# EAGLE board uart_rs232_adapter (EAGLE 9.4.2)
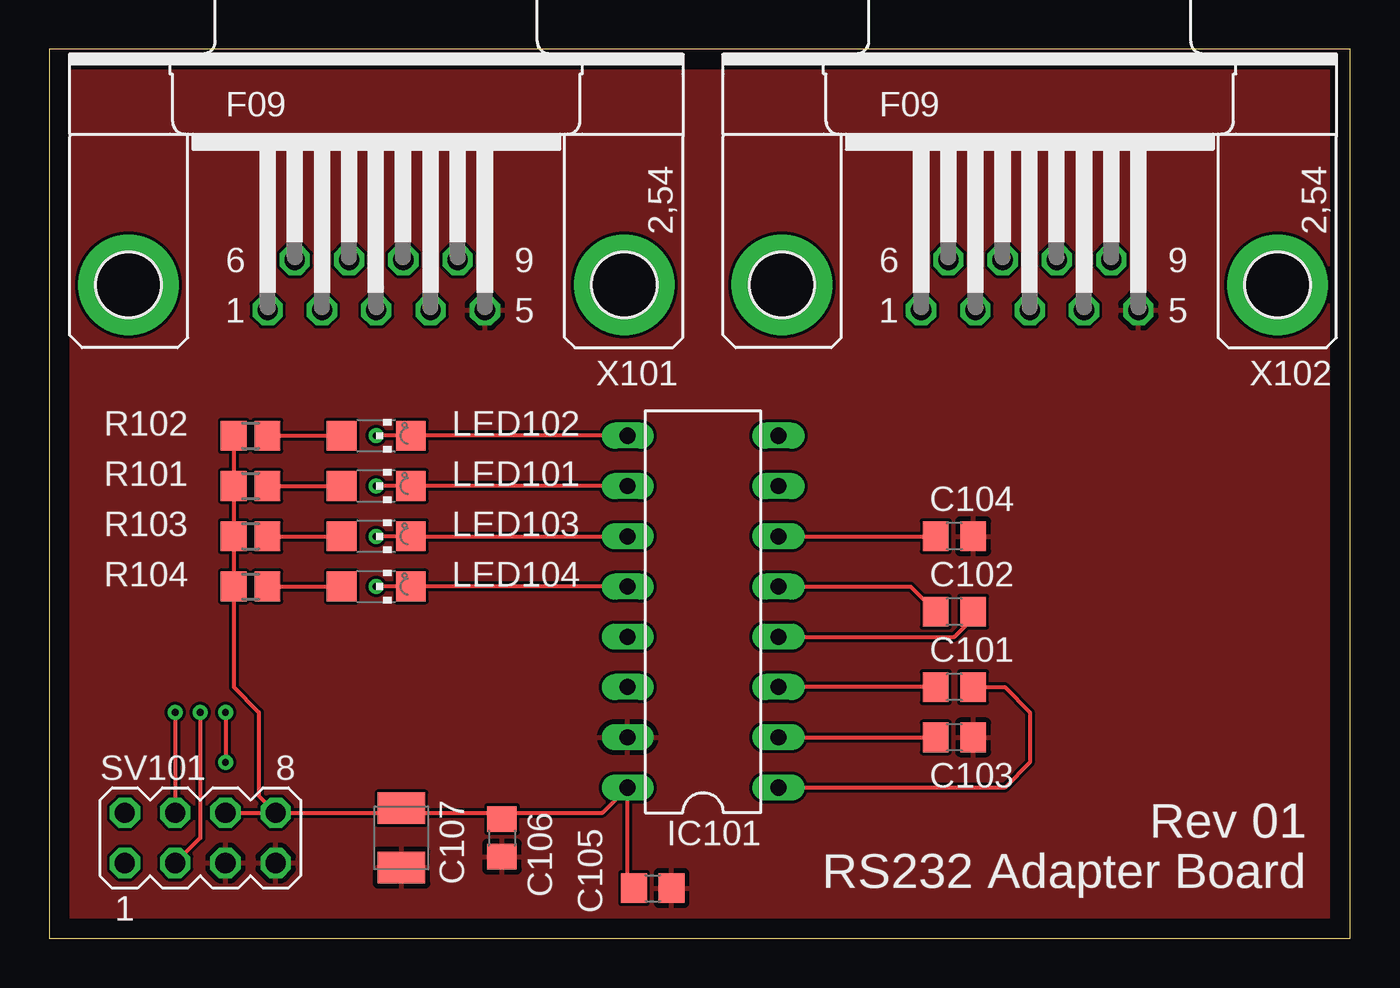
[diagram p0: board, top side]
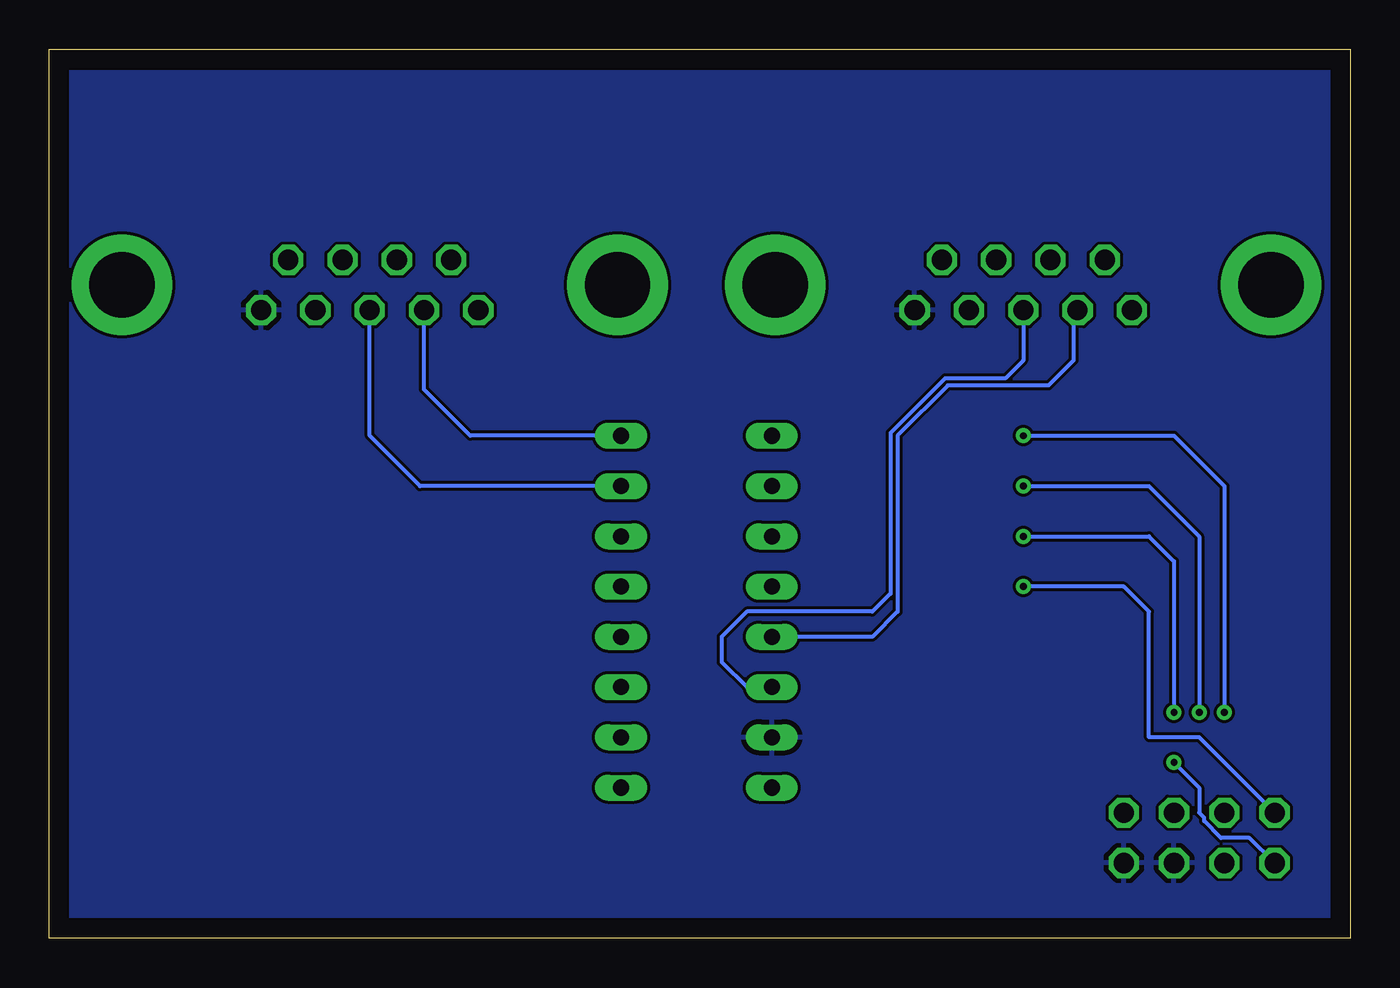
[diagram p1: board, bottom side, seen from below]

Size 65.71 x 44.92 mm. Coordinates in mm from the lower left corner, seen from the top.
Outline: 0,0 65.71,0 65.71,44.92 0,44.92 0,0
Copper layers (1*16): Top 0.035mm / dielectric 0.15mm / Bottom 0.035mm
Design rules "default": minimum track width 6mil, minimum drill 0.35mm, track to track 6mil, track to pad 6mil, pad to pad 6mil, via to via 6mil, smd to smd 6mil, copper to edge 40mil, drill to drill 6mil, minimum pad ring 10mil, minimum via ring 8mil, stop-mask expansion 4mil, vias tented up to drill 0mil, thermal gap 10mil
Net classes: 0 default: width 0.203 mm

## Footprints (pad centres in the part's own frame; a part is rotated, then mirrored left to right if it is on the bottom)
C0805 = smd 1.3 x 1.5: 1 -0.95,0; 2 0.95,0
SMC_B = smd 1.6 x 2.4: + -1.5,0; - 1.5,0
DIL16 = drill 0.813 long: 1 -8.89,-3.81; 2 -6.35,-3.81; 3 -3.81,-3.81; 4 -1.27,-3.81; 5 1.27,-3.81; 6 3.81,-3.81; 7 6.35,-3.81; 8 8.89,-3.81; 9 8.89,3.81; 10 6.35,3.81; 11 3.81,3.81; 12 1.27,3.81; 13 -1.27,3.81; 14 -3.81,3.81; 15 -6.35,3.81; 16 -8.89,3.81
CHIPLED_1206 = smd 1.5 x 1.5: A 0,-1.75; C 0,1.75
R2012 = smd 1.3 x 1.5: 1 -0.85,0; 2 0.85,0
MA04-2 = drill 1.016 octagon: 1 -3.81,-1.27; 2 -3.81,1.27; 3 -1.27,-1.27; 4 -1.27,1.27; 5 1.27,-1.27; 6 1.27,1.27; 7 3.81,-1.27; 8 3.81,1.27
F09HP = drill 1.016 octagon: 1 -5.486,-1.27; 2 -2.743,-1.27; 3 0,-1.27; 4 2.743,-1.27; 5 5.486,-1.27; 6 -4.115,1.27; 7 -1.372,1.27; 8 1.372,1.27; 9 4.115,1.27 | drill 3.302 pad 5.08: G1 -12.522,0; G2 12.522,0

## Placement (x,y rotation side)
C101  1µF  [C0805]  45.72,12.7 180 top
C102  1µF  [C0805]  45.72,16.51 180 top
C103  1µF  [C0805]  45.72,10.16 180 top
C104  1µF  [C0805]  45.72,20.32 180 top
C105  100nF  [C0805]  30.48,2.54 0 top
C106  100nF  [C0805]  22.86,5.08 270 top
C107  10µF  [SMC_B]  17.78,5.08 270 top
IC101  MAX232  [DIL16]  33.02,16.51 90 top
LED101  [CHIPLED_1206]  16.51,22.86 270 top
LED102  [CHIPLED_1206]  16.51,25.4 270 top
LED103  [CHIPLED_1206]  16.51,20.32 270 top
LED104  [CHIPLED_1206]  16.51,17.78 270 top
R101  3k  [R2012]  10.16,22.86 0 top
R102  3k  [R2012]  10.16,25.4 0 top
R103  3k  [R2012]  10.16,20.32 0 top
R104  3k  [R2012]  10.16,17.78 0 top
SV101  [MA04-2]  7.62,5.08 0 top
X101  [F09HP]  16.51,33.02 0 top
X102  [F09HP]  49.53,33.02 0 top

## Library data of the parts
C101-C104 = rcl; MOUSER: 710-885012207078; SPICEPREFIX: C
C105 C106 = rcl; MOUSER: 710-885012207072; SPICEPREFIX: C
C107 = rcl; MOUSER: 581-TAJB106K020RNJV; SPICEPREFIX: C
IC101 = maxim; MF: MAXIM; MOUSER: 595-MAX232ECN; MPN: MAX232ACPE+; OC_FARNELL: 9723773; OC_NEWARK: 68K4544
LED101-LED104 = led; MOUSER: 710-156120YS75300
R101-R104 = rcl; MOUSER: 652-CR0805JW-302ELF; SPICEPREFIX: R
SV101 = con-lstb; OC_FARNELL: unknown; OC_NEWARK: unknown
X101 X102 = con-subd; OC_FARNELL: unknown; OC_NEWARK: unknown

## Nets
+5V: C105.1 C106.1 C107.+ IC101.16 R101.1 R102.1 R103.1 R104.1 SV101.6 SV101.8
COM0_RX: IC101.13 X101.2
COM0_TX: IC101.14 X101.3
COM1_RX: IC101.8 X102.2
COM1_TX: IC101.7 X102.3
GND: C103.1 C104.1 C105.2 C106.2 C107.- IC101.15 SV101.5 SV101.7 X101.5 X102.5
N$1: LED104.A R104.2
N$2: LED103.A R103.2
N$3: LED102.A R102.2
N$5: LED101.A R101.2
N$6: C103.2 IC101.2
N$7: C104.2 IC101.6
N$8: C102.1 IC101.4
N$9: C101.1 IC101.1
N$10: C101.2 IC101.3
N$11: C102.2 IC101.5
UART0_RX: IC101.12 LED104.C SV101.2
UART0_TX: IC101.11 LED103.C SV101.1
UART1_RX: IC101.9 LED102.C SV101.4
UART1_TX: IC101.10 LED101.C SV101.3

## Tracks (layer width: path | path; a pad name or v marks a point on that pad's centre or on a via)
+5V
  Top 0.203: SV101.8 17.78,6.35 | 17.78,6.35 22.86,6.35 | 22.86,6.35 27.94,6.35 IC101.16 29.21,2.86 C105.1 | C107.+ 17.78,6.35 | SV101.6 SV101.8 | R102.1 R101.1 R103.1 R104.1 9.31,12.7 10.58,11.43 10.58,7.2 SV101.8 | C106.1 22.86,6.35
COM0_RX
  Bottom 0.203: X101.2 13.97,31.55 13.97,29.21 15.24,27.94 20.32,27.94 22.86,25.4 22.86,16.51 24.13,15.24 IC101.13
COM0_TX
  Bottom 0.203: X101.3 16.51,29.21 17.42,28.3 20.47,28.3 23.22,25.55 23.22,17.42 24.13,16.51 30.48,16.51 31.75,15.24 31.75,13.97 30.48,12.7 IC101.14
COM1_RX
  Bottom 0.203: IC101.8 44.45,25.4 46.79,27.74 X102.2
COM1_TX
  Bottom 0.203: X102.3 49.53,25.4 46.99,22.86 IC101.7
GND
  pour Top: 0,0 0,44.45 66.04,44.45 66.04,0
  pour Bottom: 0,0 0,44.45 66.04,44.45 66.04,0
N$1
  Top 0.203: R104.2 LED104.A
N$2
  Top 0.203: R103.2 LED103.A
N$3
  Top 0.203: R102.2 LED102.A
N$5
  Top 0.203: R101.2 LED101.A
N$6
  Top 0.203: IC101.2 C103.2
N$7
  Top 0.203: IC101.6 C104.2
N$8
  Top 0.203: IC101.4 45.72,15.24 46.99,16.51 C102.1
N$9
  Top 0.203: C101.1 48.26,12.7 49.53,11.43 49.53,8.89 48.26,7.62 IC101.1
N$10
  Top 0.203: C101.2 IC101.3
N$11
  Top 0.203: IC101.5 43.5,17.78 C102.2
UART0_RX  (via drill 0.35)
  Top 0.203: IC101.12 LED104.C v16.51,17.78
  Bottom 0.203: SV101.2 7.62,10.16 10.16,10.16 10.16,16.51 11.43,17.78 v16.51,17.78
UART0_TX  (via drill 0.35)
  Top 0.203: IC101.11 LED103.C v16.51,20.32 | v8.89,11.43 v8.89,8.89
  Bottom 0.203: v8.89,8.89 7.62,7.62 7.62,6.35 7.37,6.1 7.37,5.93 6.52,5.08 5.08,5.08 SV101.1 | v16.51,20.32 10.16,20.32 8.89,19.05 v8.89,11.43
UART1_RX  (via drill 0.35)
  Top 0.203: IC101.9 LED102.C v16.51,25.4 | v6.35,11.43 SV101.4
  Bottom 0.203: v6.35,11.43 6.35,22.86 8.89,25.4 v16.51,25.4
UART1_TX  (via drill 0.35)
  Top 0.203: SV101.3 7.62,5.08 v7.62,11.43 | IC101.10 LED101.C v16.51,22.86
  Bottom 0.203: v16.51,22.86 10.16,22.86 7.62,20.32 v7.62,11.43

## Text on the board
tNames: Rev 01 | RS232 Adapter Board